# Altium PCB Probe1152A.PcbDoc
Units mm, origin at the board's own origin, x right, y up, seen from the top; angles counter-clockwise.
Board outline 55.5 x 13.56 mm, 2 copper layers (Top Layer, Bottom Layer); 6 components, 6 nets, 38 pads, 7 vias.
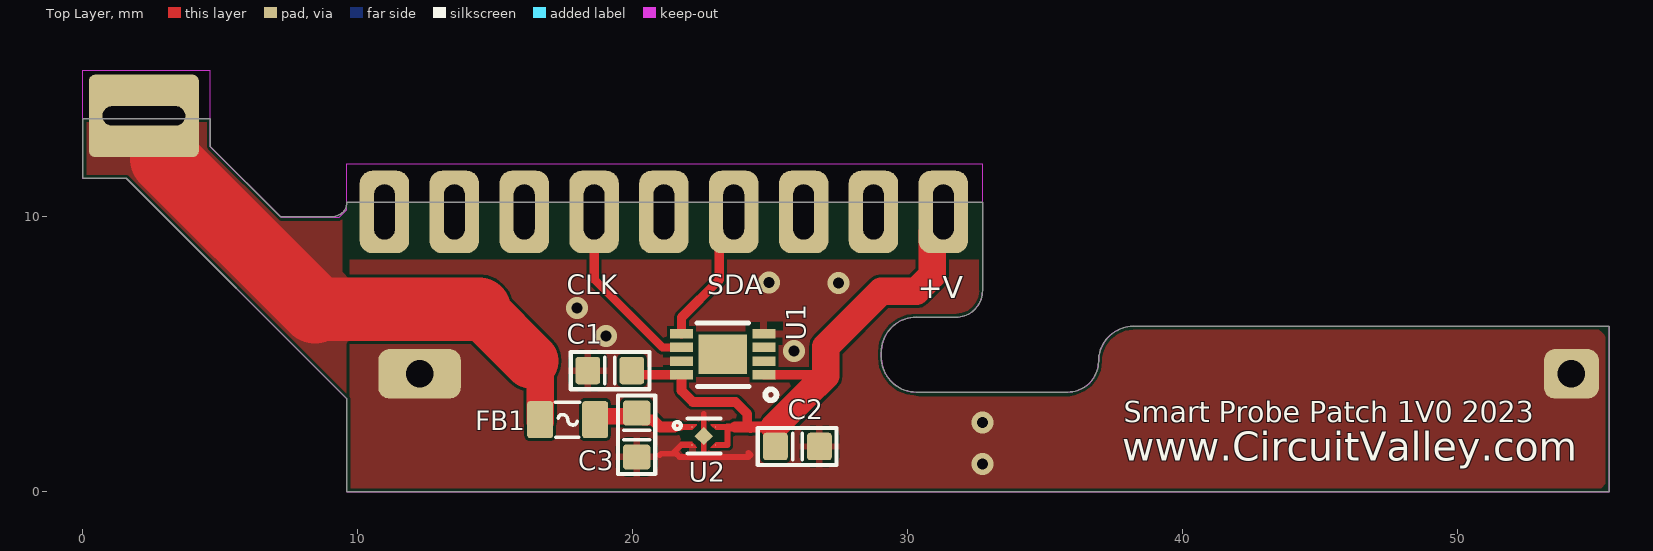
[diagram p0: Top Layer view]
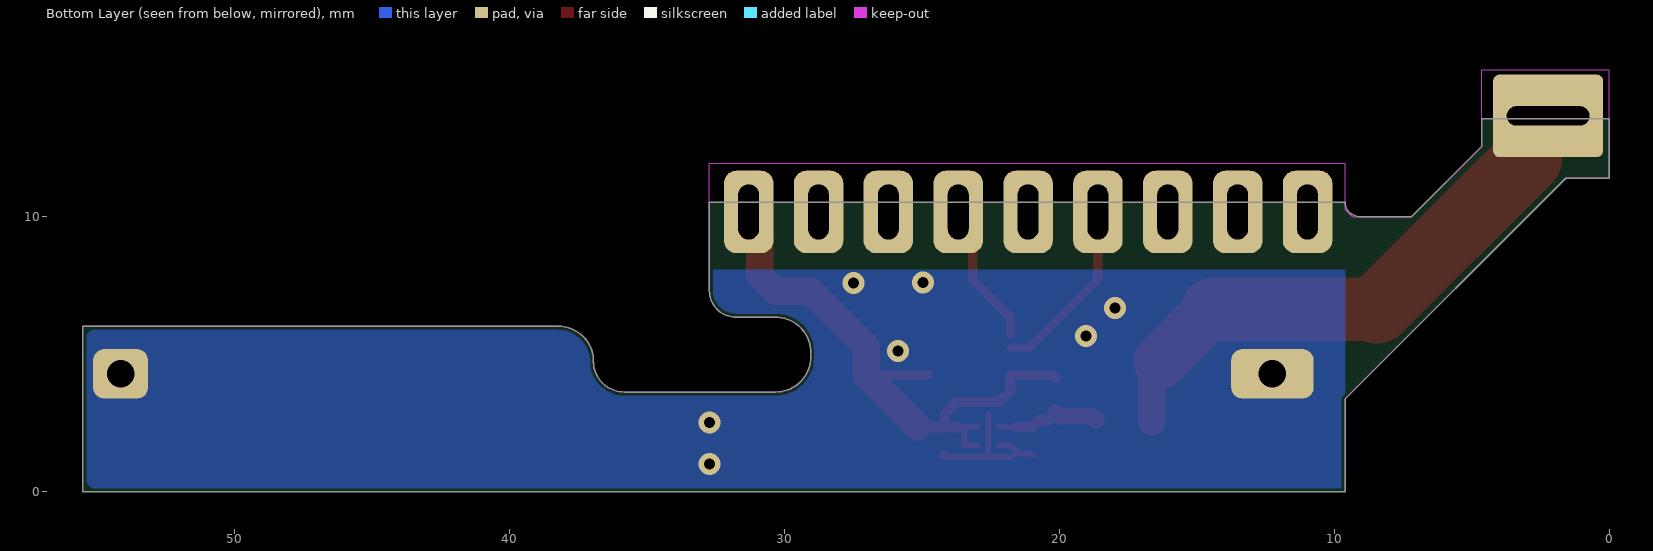
[diagram p1: Bottom Layer view, seen from below]
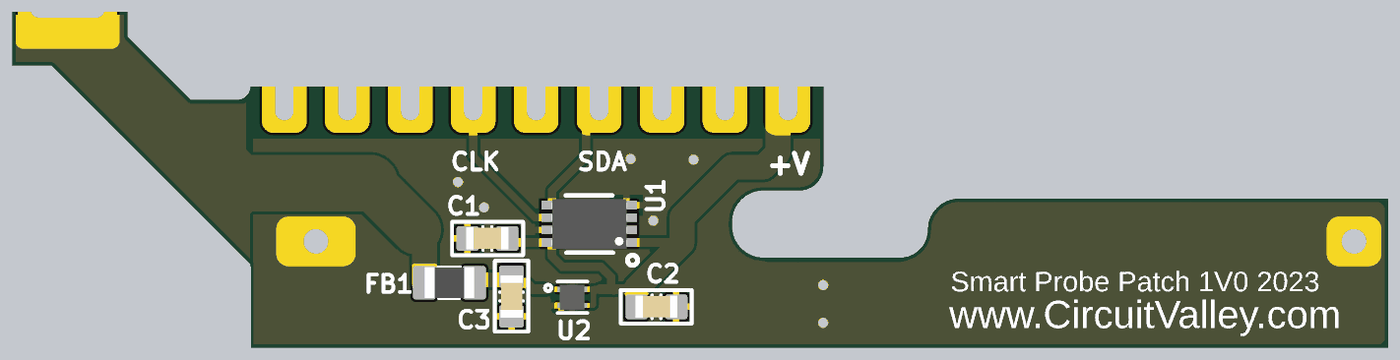
[diagram p2: 3D render of the assembled board from above, using the file's embedded part models]

## Layer stack, top to bottom
Top Solder: solder mask 0.0102, Solder Resist, Dk 3.5
Top Layer: signal copper 0.0356
Dielectric 1: dielectric 0.32, FR-4, Dk 4.8
Bottom Layer: signal copper 0.0356
Bottom Solder: solder mask 0.0102, Solder Resist, Dk 3.5

## Board outline
7.188,10.008 9.068,10.008 ccw(c9.068,10.541) 9.601,10.541 32.715,10.541 32.715,7.315 cw(c31.75,7.315) 31.75,6.35 30.302,6.35 ccw(c30.302,5.08) 29.032,5.08 29.032,4.902 ccw(c30.302,4.902) 30.302,3.632 35.814,3.632 ccw(c35.814,4.75) 36.932,4.75 cw(c38.202,4.75) 38.202,6.02 55.499,6.02 55.499,0 9.601,0 9.601,3.378 1.575,11.405 0,11.405 0,13.564 4.638,13.564 4.638,12.558

## Design rules (kind name [scope] priority, off if disabled: settings)
Clearance [All] p1: gap=0.11 ignorepadtopadclearanceinfootprint=FALSE except(0: Arc-Hole Track-Hole SMDPad-Hole THPad-Hole Via-Hole Fill-Hole Poly-Hole Region-Hole Text-Hole)
DiffPairsRouting [All] p1: maxlimit=0.254 minlimit=0.152 mostfreqgap=0.152 toplayer_minwidth=0.152 toplayer_maxwidth=0.381 toplayer_prefwidth=0.152 bottomlayer_minwidth=0.152 bottomlayer_maxwidth=0.381 bottomlayer_prefwidth=0.152 maxuncoupledlength=12.7
MatchedLengths MIPI2 [InNetClass('MIPI_2S')] p1: tolerance=0.127 checknetsindiffpair=TRUE checkdiffpairvsdiffpair=FALSE checkxsignals=FALSE checkothers=FALSE
MatchedLengths MIPI [InNetClass('MIPI')] p2: tolerance=0.127 checknetsindiffpair=TRUE checkdiffpairvsdiffpair=FALSE checkxsignals=FALSE checkothers=FALSE
PolygonConnect [All] p1: thpad.connectstyle=Direct thpad.reliefconductorwidth=0.254 thpad.reliefentries=4 thpad.polygonreliefangle="90 Angle" thpad.airgapwidth=0.254 smdpad.connectstyle=Relief smdpad.reliefconductorwidth=0.254 smdpad.reliefentries=4 smdpad.polygonreliefangle="90 Angle" smdpad.airgapwidth=0.254 via.connectstyle=Direct via.reliefconductorwidth=0.254 via.reliefentries=4 via.polygonreliefangle="90 Angle" via.airgapwidth=0.254
RoutingVias [All] p1: holewidth=0.3 width=0.61 viastyle="Through Hole" minholewidth=0.254 minwidth=0.508 maxholewidth=5 maxwidth=6.35
SolderMaskExpansion [All] p1: expansion=0.102 istentingtop=FALSE
Width [All] p1: maxlimit=12.7 minlimit=0.152 preferedwidth=0.254
29 further rules are at their usual default settings.

## Components (designator, comment, footprint, x,y, rotation, side; value= is the part's Value field where it differs from the comment)
C1 "approved sub OK" CAPC1608N 19.163,4.412 r180 top value=10u
C2 "approved sub OK" CAPC1608N 25.984,1.651 r0 top value=10u
C3 "approved sub OK" CAPC1608N 20.136,2.069 r270 top value=10u
FB1 "" FBC2012N 17.629,2.626 r180 top
U1 "M24C02-RMC6TG" DFN8_3x2_NO_PPAD 23.266,5.004 r180 top
U2 "TPS7A2040PDQNR" X2SON-4 22.581,2.032 r0 top

## Footprints (in the part's own frame and the unit in brackets; to place one, negate y for a bottom-side part, rotate by r counter-clockwise, add the part's x,y. Pads: shape width x height; smd on the part's side, far side on the other; paste and mask are expansions set on the pad)
CAPC1608N [mm] "Chip Capacitor, Body 1.6x0.8mm, 0603, IPC Medium Density"
  round 0.254 on Mech14: 0(0,0)
  rrect25% 0.9x1 smd: 1(-0.8,0) 2(0.8,0)
  silkscreen extent -1.44,-0.67 1.42,0.68, body extent -0.85,-0.45 0.85,0.45, height 0.89
DFN8_3x2_NO_PPAD [mm] "MC24C02"
  rect 0.85x0.35 smd: 1(-1.5,0.75) 2(-1.5,0.25) 3(-1.5,-0.25) 4(-1.5,-0.75) 5(1.5,-0.75) 6(1.5,-0.25) 7(1.5,0.25) 8(1.5,0.75)
  rect 1.75x1.45 smd: 9(0,0)
  silkscreen extent -1.95,-1.14 0.94,1.67, body extent -1.53,-1 1.51,1, height 0.91
FBC2012N [mm] "Ferrite Bead Chip, Body 2.0x1.2mm, 0805, IPC Medium Density"
  round 0.508 on Mech14: 0(0,0)
  rrect25% 0.95x1.35 smd: 1(-1,0) 2(1,0)
  silkscreen extent -0.43,-0.64 0.46,0.64, body extent -1,-0.62 1,0.63, height 0.9
X2SON-4 [mm] "TPS7A2040PDQNR"
  round 0.025 smd: 1(-0.43,0.325) 2(-0.43,-0.325) 3(0.43,-0.325) 4(0.43,0.325)
  rect 0.48x0.48 smd rot 45: 5(0,0)
  Top Layer region: 0.43,0.22 0.61,0.22 0.61,0.43 0.25,0.43 0.25,0.4
  Top Layer region: 0.43,-0.22 0.61,-0.22 0.61,-0.43 0.25,-0.43 0.25,-0.4
  Top Layer region: -0.43,-0.22 -0.61,-0.22 -0.61,-0.43 -0.25,-0.43 -0.25,-0.4
  Top Layer region: -0.43,0.22 -0.61,0.22 -0.61,0.43 -0.25,0.43 -0.25,0.4
  silkscreen extent -1.09,-0.64 0.61,0.64, body extent -0.5,-0.5 0.5,0.5, height 0.37

## Part data
C1 C2 C3: library part CAPC_560p_0603_5%, "Capacitor SMD Cer 560pF 5% 50V NP0 0603", Capacitance=470pF, Manufacturer 1="AVX Corporation", Manufacturer Part Number 1=06035A561JAT2A, Operating Temperature="-55°C ~ 125°C", Package / Case="0603 (1608 metric)", Ratings="50V; NP0", Supplier Part Number 1=478-1184-1-ND, Voltage - Rated=50V, Applications="General Purpose", ComponentLink1Description=http://www.avx.com/docs/Catalogs/ccog.pdf, ComponentLink1URL=http://www.avx.com/docs/Catalogs/ccog.pdf, Height - Seated (Max)=-, Lead Spacing=-, Lead Style=-, Material=ceramic, Mounting Type="Surface Mount, MLCC", Size / Dimension="0.063\" L x 0.032\" W (1.60mm x 0.81mm)", Supplier 1=Digi-Key, Thickness (Max)="0.035\" (0.90mm)"
FB1: library part FERRITE_2K2-100MHz_0805, "Ferrite bead 2.2K Ohm at 100 MHz 200mA 0805 SMD", Current Rating=200mA, DC Resistance (DCR)="800 mOhm Max", Impedance @ Frequency="600 Ohm @ 100MHz", Manufacturer 1="Laird-Signal Integrity Products", Manufacturer Part Number 1=HZ0805B222R-10, Package / Case="0805 (2012 Metric)", Ratings="200 mA; 800 mOhm DC", Supplier Part Number 1=240-2562-1-ND, ComponentLink1Description=http://www.lairdtech.com/WorkArea/linkit.aspx?LinkIdentifier=id&ItemID=4879, ComponentLink1URL=http://www.lairdtech.com/WorkArea/linkit.aspx?LinkIdentifier=id&ItemID=4879, Filter Type="Differential Mode - Single", Height (Max)="0.043\" (1.09mm)", Mounting Type="Surface Mount", Size / Dimension="0.063\" L x 0.031\" W (1.60mm x 0.80mm)", Supplier 1=Digi-Key
U2: "LDO"

## Free pads (board coordinates)
  rrect50% 1.8x3 hole 0.75 slot 2 at 90 deg: 1(31.288,10.18) 2(28.748,10.18) 3(26.208,10.18) 4(23.668,10.18) 5(21.128,10.18) 6(18.588,10.18) 7(16.048,10.18) 8(13.508,10.18) 9(10.968,10.18)
  rrect15% 4x3 hole 0.7 slot 3 at 0 deg: 10(2.22,13.673)
  rrect45% 3x1.8 hole 1: 10(12.243,4.293)
  rrect45% 2x1.8 hole 1: 10(54.127,4.293)

## Via types
v1: diameter 0.8, hole 0.4, Top Layer to Bottom Layer, tented both sides, 7 vias

## Nets (pads, with @x,y where several pads share a name; then routed paths per layer and width w, separated by ;. In a path a pad name is that pad's centre, name@x,y a point inside that pad or via, vN(x,y) a via of type N, cw(c..) or ccw(c..) an arc to the next point about the centre after c; other vN are vias at no path point)
4V: FB1.2 pad.10@2.22,13.673 | length 19.9
  Top Layer w1: 16.292,4.765 16.629,4.428 FB1.2@16.629,2.55
  Top Layer w2: 14.414,6.643 16.292,4.765
  Top Layer w2.3: 8.437,6.643 14.414,6.643
  Top Layer w2.5: pad.10@2.72,13.14 2.97,12.89 2.97,12.109 8.437,6.643
5V: C1.1 C2.1 pad.1 U1.1 U1.8 U2.3 U2.4 | length 22.1
  Top Layer w0.152: U2.3 23.134,1.707 ; U2.4 23.114,2.357
  Top Layer w0.21: 23.114,2.357 23.424,2.357 23.439,2.342 23.439,1.707 23.134,1.707
  Top Layer w0.3: 23.439,2.342 23.714,2.342
  Top Layer w0.35: C1.1@20.115,4.133 20.236,4.254 U1.8 21.766,3.684 22.182,3.269 23.731,3.269 24.157,2.843 24.157,2.471 24.282,2.346 ; U1.1 26.988,4.254 27.013,4.229 ; 26.048,3.644 26.238,3.454
  Top Layer w0.4: 23.714,2.362 24.134,2.362 25.146,2.362 ; 24.282,2.346 24.298,2.362
  Top Layer w1: 25.146,2.362 26.238,3.454 27.013,4.229 27.013,5.271 29.036,7.295 30.302,7.295 30.888,7.88 30.888,9.445 pad.1@31.293,9.85
GND: C1.2 C2.2 C3.2 pad.10@12.243,4.293 pad.10@54.127,4.293 U1.4 U1.7 U2.2 U2.5 | length 5.8
  Top Layer w0.152: 21.976,1.707 U2.2
  Top Layer w0.21: 20.98,1.346 21.023,1.389 21.444,1.389 ; 21.976,1.707 21.763,1.707 21.444,1.389 ; 22.581,2.842 U2.5 22.581,1.27 ; 24.206,1.27 22.581,1.27 ; 24.206,1.422 24.282,1.346 ; 21.444,1.389 21.573,1.389 21.692,1.27 22.581,1.27
  other v1: 32.708,1.007 32.708,2.524 25.857,5.131 19.023,5.661 17.972,6.69 27.483,7.595 24.943,7.62
I2C_CLK: pad.6 U1.6 | length 6.3
  Top Layer w0.3: 18.59,7.742 21.078,5.254 U1.6
  Top Layer w0.34: 18.59,7.742 pad.6@18.59,9.85
I2C_SDA: pad.4 U1.5 | length 4.8
  Top Layer w0.34: U1.5 21.766,6.339 23.139,7.712 23.139,9.245 pad.4@23.668,9.774
NetC3_1: C3.1 FB1.1 U2.1 | length 3.8
  Top Layer w0.152: 21.976,2.357 U2.1
  Top Layer w0.21: 21.763,2.357 21.976,2.357
  Top Layer w0.25: 21.519,2.357 21.763,2.357
  Top Layer w0.4: C3.1 20.386,2.619 20.729,2.619 20.991,2.357 21.519,2.357
  Top Layer w0.6: FB1.1 18.682,2.626 18.804,2.748 20.014,2.748 C3.1
pads on no net: C1.0 C2.0 C3.0 FB1.0 U1.2 U1.3 U1.9

## Polygon pours and split planes (outlines as drawn)
GND on Bottom Layer "GND_L02_P001" (solid, pour order 1): 9.601,0 9.601,8.077 32.715,8.077 32.715,6.731 cw(c32.233,6.731) 32.233,6.248 30.632,6.248 ccw(c30.632,4.978) 29.362,4.978 29.362,4.801 ccw(c30.632,4.801) 30.632,3.531 35.712,3.531 ccw(c35.712,4.75) 36.932,4.75 cw(c38.202,4.75) 38.202,6.02 54.762,6.02 cw(c54.762,5.283) 55.499,5.283 55.499,0.787 cw(c54.712,0.787) 54.712,0
GND on Top Layer "GND_L01_P000" (solid, pour order 0): 9.703,0 9.703,8.433 32.664,8.433 32.664,6.782 cw(c32.207,6.782) 32.207,6.325 30.607,6.325 ccw(c30.607,5.004) 29.286,5.004 29.286,4.75 ccw(c30.582,4.75) 30.582,3.454 35.687,3.454 ccw(c35.687,4.775) 37.008,4.775 cw(c38.227,4.775) 38.227,5.994 54.737,5.994 cw(c54.737,5.258) 55.474,5.258 55.474,0.66 cw(c54.839,0.66) 54.839,0.025
4V on Top Layer "4V_L01_P002" (solid, pour order 2): 0,13.437 0,11.405 1.575,11.405 9.504,3.475 9.695,3.475 9.695,7.734 9.423,8.006 9.423,9.906 7.29,9.906 4.648,12.548 4.648,13.437
no net on Mechanical 16 "NONET_L01_P-001" (solid): 15.011,7.696 15.011,-0.025 28.143,-0.025 28.143,7.696

## Keep-outs
Keep-Out Layer:
  lines w0.025: 0,11.405 0,15.34 4.638,15.34 4.638,12.558 7.214,9.982 9.322,9.982 9.601,10.262 9.601,11.938 32.715,11.938 32.715,10.5 32.715,7.315 cw(c31.75,7.315) 31.75,6.35 30.302,6.35 ccw(c30.302,5.08) 29.032,5.08 29.032,4.902 ccw(c30.302,4.902) 30.302,3.632 35.814,3.632 ccw(c35.814,4.75) 36.932,4.75 cw(c38.202,4.75) 38.202,6.02 55.499,6.02 55.499,0 55.22,0 32.715,0 9.601,0 9.601,3.381 1.578,11.405 0,11.405

## Silkscreen, mask and mechanical layers (free items; w line width, h text height)
Top Overlay:
  text "CLK" at 17.6,7.186 h0.7
  text "SDA" at 22.708,7.186 h0.7
  text "+V" at 30.35,7.036 h0.8
  text "Smart Probe Patch 1V0 2023" at 37.846,2.275 h1.3
  text "www.CircuitValley.com" at 37.795,0.796 h1.8
Mechanical 13:
  lines w0.025: 0,11.405 0,0 9.601,0 8.001,0 ; 2.438,13.551 9.144,13.551 9.144,10.547 9.713,10.547 ; 4.013,13.538 4.013,0 8.001,0 ; 8.001,13.513 8.001,0 ; 9.576,8.915 17.323,8.915 ; 12.268,4.216 12.268,8.839 ; 32.715,-0.305 32.715,7.01 ; 9.713,10.547 9.713,18.65 32.547,18.65 32.547,10.547 9.713,10.547
  lines w0.6: 10.968,9.2 10.968,10.5 ; 13.508,9.2 13.508,10.5 ; 16.049,9.2 16.049,10.5 ; 18.59,9.2 18.59,10.5 ; 21.13,9.2 21.13,10.5 ; 23.671,9.2 23.671,10.5 ; 26.212,9.2 26.212,10.5 ; 28.752,9.2 28.752,10.5 ; 31.293,9.2 31.293,10.5
OutlineCUt:
  lines w0.025: 0,11.405 0,11.786 0,13.564 4.623,13.564 4.638,13.564 4.638,13.498 4.638,12.558 7.188,10.008 9.068,10.008 ccw(c9.068,10.541) 9.601,10.541 32.715,10.541 32.715,7.315 cw(c31.75,7.315) 31.75,6.35 30.302,6.35 ccw(c30.302,5.08) 29.032,5.08 29.032,4.902 ccw(c30.302,4.902) 30.302,3.632 30.353,3.632 35.814,3.632 ccw(c35.814,4.75) 36.932,4.75 cw(c38.202,4.75) 38.202,6.02 38.481,6.02 55.499,6.02 55.499,0 9.601,0 9.601,3.378 1.575,11.405 0,11.405